# Altium PCB Mikrolysreklamen17.PcbDoc (part 2 of 2)
Units mm, origin at the board's own origin, x right, y up, seen from the top; angles counter-clockwise.
Board outline 168.74 x 42.98 mm, 2 copper layers (Top Layer, Bottom Layer), stack 1.671 mm thick; 124 components, 180 nets, 652 pads, 157 vias.
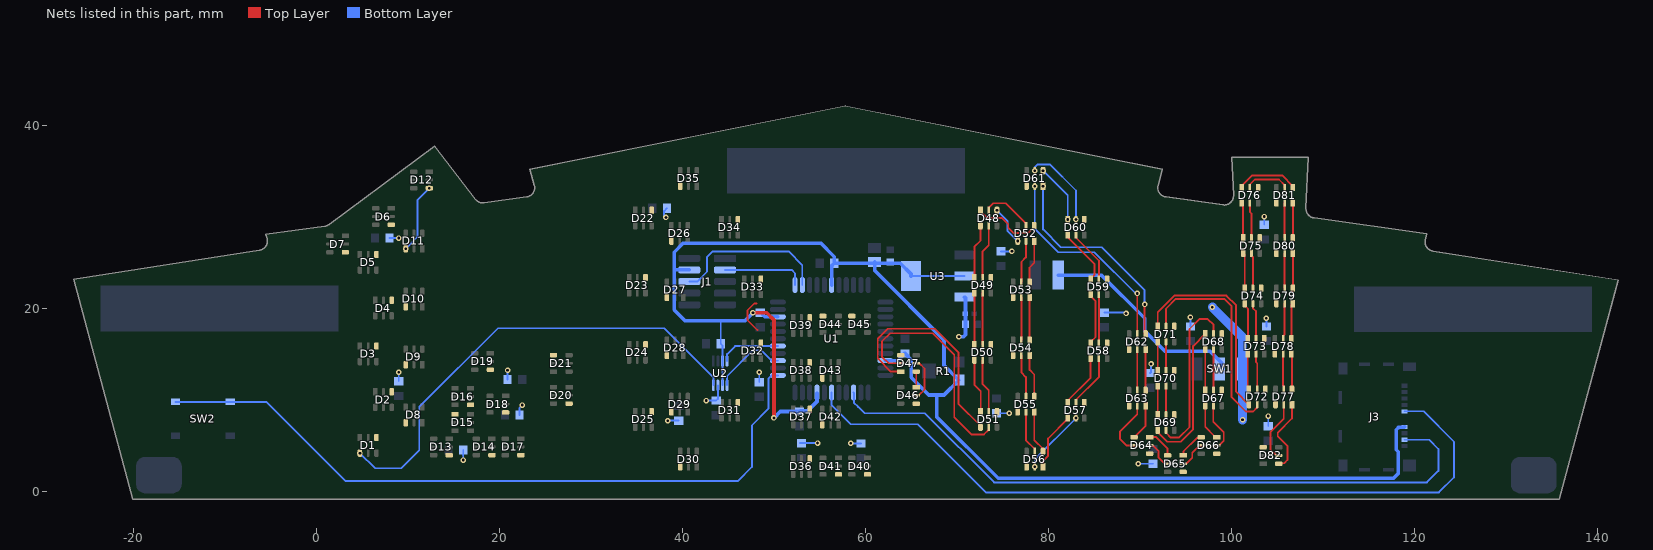
[diagram p2: the nets of this part, all layers, seen from the top]

## Via types
v1: diameter 0.6, hole 0.3, Top Layer to Bottom Layer, tented both sides, 157 vias

## Nets (pads, with @x,y where several pads share a name; then routed paths per layer and width w, separated by ;. In a path a pad name is that pad's centre, name@x,y a point inside that pad or via, vN(x,y) a via of type N, cw(c..) or ccw(c..) an arc to the next point about the centre after c; other vN are vias at no path point) (continued)
NetD46_2: D46.2 D47.5 | length 4.6
  Top Layer w0.2: D46.2@65.55,10.467 65.817,10.467 66.45,11.1 66.45,13.4 65.883,13.967 D47.5@65.55,13.967
NetD46_3: D46.3 D47.4 | length 1.7
  Top Layer w0.2: D46.3@65.55,11.4 D47.4@65.55,13.067
NetD47_2: D47.2 D51.5 | length 25.1
  Top Layer w0.2: D47.2@63.85,13.967 62.533,13.967 61.8,14.7 61.8,16.35 62.7,17.25 67.35,17.25 69.7,14.9 69.7,8.05 71.55,6.2 72.95,6.2 73.467,6.717 D51.5@73.467,6.983 D51.5@73.467,7
NetD47_3: D47.3 D51.4 | length 24.8
  Top Layer w0.2: D47.3@63.85,13.067 62.783,13.067 61.35,14.5 61.35,16.65 62.45,17.75 67.583,17.75 70.15,15.183 70.15,9.55 72.567,7.133 D51.4@72.567,6.983
NetD48_2: D48.2 D52.5 | length 5.7
  Top Layer w0.2: D48.2@73.467,30.683 73.467,30.967 73.95,31.45 75.35,31.45 77.533,29.267 D52.5@77.533,29.017
NetD48_3: D48.3 D52.4 | length 7.6
  Top Layer w0.2: D48.3@72.567,30.683 72.567,30.583 73.3,29.85 74.9,29.85 75.6,29.15 75.6,28.8 76.2,28.2 77.75,28.2 78.433,28.883 D52.4@78.433,29.017
NetD48_4: D48.4 D49.3 | length 5.9
  Top Layer w0.2: D49.3@71.9,23.35 71.9,26.7 72.567,27.367 D48.4@72.567,28.983
NetD48_5: D48.5 D49.2 | length 5.9
  Top Layer w0.2: D49.2@72.8,23.35 72.8,26.2 73.467,26.867 D48.5@73.467,28.983 D48.5@73.467,29
NetD49_4: D49.4 D50.3 | length 5.6
  Top Layer w0.2: D50.3@71.9,16 D50.3@71.9,16.017 D49.4@71.9,21.65
NetD49_5: D49.5 D50.2 | length 5.6
  Top Layer w0.2: D50.2@72.8,16.017 D49.5@72.8,21.65
NetD50_4: D50.4 D51.3 | length 6
  Top Layer w0.2: D50.4@71.9,14.317 71.9,11.633 72.6,10.933 D51.3@72.6,8.65
NetD50_5: D50.5 D51.2 | length 5.9
  Top Layer w0.2: D50.5@72.8,14.3 72.8,11.7 73.467,11.033 D51.2@73.467,8.683
NetD52_2: D52.2 D53.5 | length 4.7
  Top Layer w0.2: D53.5@77.033,22.85 77.033,25.033 77.533,25.533 D52.2@77.533,27.317
NetD52_3: D52.3 D53.4 | length 4.7
  Top Layer w0.2: D53.4@77.933,22.85 77.933,24.433 78.433,24.933 D52.3@78.433,27.317
NetD53_2: D53.2 D54.5 | length 4.6
  Top Layer w0.2: D54.5@77.033,16.517 D53.2@77.033,21.15
NetD53_3: D53.3 D54.4 | length 4.6
  Top Layer w0.2: D54.4@77.933,16.517 D53.3@77.933,21.15
NetD54_2: D54.2 D55.5 | length 4.7
  Top Layer w0.2: D54.2@77.033,14.817 77.033,12.967 77.533,12.467 D55.5@77.533,10.35
NetD54_3: D54.3 D55.4 | length 4.7
  Top Layer w0.2: D54.3@77.933,14.817 77.933,13.242 78.433,12.742 D55.4@78.433,10.35
NetD55_2: D55.2 D56.5 | length 4.7
  Top Layer w0.2: D55.2@77.533,8.65 77.533,5.567 78.5,4.6 D56.5@78.5,4.35
NetD55_3: D55.3 D56.4 | length 4.7
  Top Layer w0.2: D55.3@78.433,8.65 78.433,5.567 79.4,4.6 D56.4@79.4,4.35
NetD56_2: D56.2 D57.5 | length 7.2
  Bottom Layer w0.2: v1(78.5,2.65) 78.5,3.483 v1(83,7.983)
NetD56_3: D56.3 D57.4 | length 6.5
  Top Layer w0.2: D56.3@79.4,2.65 79.4,3.3 79.95,3.85 79.95,5.75 82.1,7.9 D57.4@82.1,7.983
NetD57_2: D57.2 D58.5 | length 5.8
  Top Layer w0.2: D57.2@83,9.683 83,9.967 85.5,12.467 D58.5@85.5,14.483
NetD57_3: D57.3 D58.4 | length 5.8
  Top Layer w0.2: D57.3@82.1,9.683 82.1,9.9 84.6,12.4 D58.4@84.6,14.483
NetD58_2: D58.2 D59.5 | length 5.3
  Top Layer w0.2: D58.2@85.5,16.183 D59.5@85.5,21.483
NetD58_3: D58.3 D59.4 | length 5.7
  Top Layer w0.2: D58.3@84.6,16.183 84.6,16.3 85.14,16.84 85.14,20.76 84.6,21.3 D59.4@84.6,21.483
NetD59_2: D59.2 D60.5 | length 5.8
  Top Layer w0.2: D60.5@83,27.983 83,27.7 85.5,25.2 D59.2@85.5,23.183
NetD59_3: D59.3 D60.4 | length 6.3
  Top Layer w0.2: D60.4@82.1,27.983 82.1,27.75 85.01,24.84 85.01,23.6 84.893,23.483 84.75,23.483 84.6,23.333 D59.3@84.6,23.183
NetD60_2: D60.2 D61.5 | length 9.4
  Bottom Layer w0.2: v1(78.5,35.017) 78.533,35.049 78.533,35.433 78.8,35.7 80.15,35.7 83,32.85 v1(83,29.683)
NetD60_3: D60.3 D61.4 | length 6.5
  Bottom Layer w0.2: v1(79.4,35.017) 82.1,32.317 v1(82.1,29.683)
NetD61_2: D61.2 D62.5 | length 23.5
  Top Layer w0.2: v1(78.5,33.317) D61.2@78.5,33.6 ; D62.5@89.7,17.183 v1(89.7,21.6)
  Bottom Layer w0.2: v1(78.5,33.317) 78.5,28.65 81.05,26.1 85,26.1 89.5,21.6 v1(89.7,21.6)
NetD61_3: D61.3 D62.4 | length 23.4
  Top Layer w0.2: v1(90.5,20.4) 90.477,20.377 90.477,17.307 D62.4@90.6,17.183
  Bottom Layer w0.2: v1(79.4,33.317) 79.4,28.6 81.35,26.65 85.8,26.65 90.5,21.95 v1(90.5,20.4)
NetD62_2: D62.2 D63.5 | length 4.5
  Top Layer w0.2: D63.5@89.7,11.017 D62.2@89.7,15.483
NetD62_3: D62.3 D63.4 | length 4.5
  Top Layer w0.2: D63.4@90.6,11.017 D62.3@90.6,15.483
NetD63_2: D63.2 D64.5 | length 6.2
  Top Layer w0.2: D64.5@89.35,5 88.5,5 87.8,5.7 87.8,6.5 89.7,8.4 D63.2@89.7,9.317
NetD63_3: D63.3 D64.4 | length 3.9
  Top Layer w0.2: D64.4@89.35,5.9 90.6,7.15 D63.3@90.6,9.317
NetD64_2: D64.2 D65.5 | length 3.2
  Top Layer w0.2: D64.2@91.05,5 91.4,5 92,4.4 92,3.7 92.7,3 D65.5@93.017,3
NetD64_3: D64.3 D65.4 | length 3.2
  Top Layer w0.2: D64.3@91.05,5.9 91.75,5.9 93.017,4.633 D65.4@93.017,3.9
NetD65_2: D65.2 D66.5 | length 3.1
  Top Layer w0.2: D65.2@94.717,3 95.05,3 95.7,3.65 95.7,4.2 96.5,5 D66.5@96.683,5
NetD65_3: D65.3 D66.4 | length 3
  Top Layer w0.2: D65.3@94.717,3.9 94.733,3.916 94.733,4.333 96.191,5.791 96.574,5.791 D66.4@96.683,5.9
NetD66_2: D66.2 D67.5 | length 5.3
  Top Layer w0.2: D67.5@98.033,9.317 98,9.283 98,7.6 99.15,6.45 99.15,5.5 98.65,5 D66.2@98.383,5
NetD66_3: D66.3 D67.4 | length 3.8
  Top Layer w0.2: D67.4@97.133,9.317 97.133,7.017 D66.3@98.183,5.967
NetD67_2: D67.2 D68.5 | length 4.5
  Top Layer w0.2: D67.2@98.033,11.017 D68.5@98.033,15.483 D68.5@98.033,15.517
NetD67_3: D67.3 D68.4 | length 4.5
  Top Layer w0.2: D67.3@97.133,11.017 D68.4@97.133,15.483
NetD68_2: D68.2 D69.5 | length 18.6
  Top Layer w0.2: D69.5@92.833,6.65 92.833,6.367 93.35,5.85 94.25,5.85 95.4,7 95.4,17.717 96.483,18.8 97.4,18.8 98.033,18.167 D68.2@98.033,17.183
NetD68_3: D68.3 D69.4 | length 16.1
  Top Layer w0.2: D69.4@91.933,6.65 91.933,6.417 92.95,5.4 94.433,5.4 95.8,6.767 95.8,15.85 D68.3@97.133,17.183
NetD69_2: D69.2 D70.5 | length 3.1
  Top Layer w0.2: D69.2@92.833,8.35 D70.5@92.833,11.483
NetD69_3: D69.3 D70.4 | length 3.1
  Top Layer w0.2: D69.3@91.933,8.35 D70.4@91.933,11.483
NetD70_2: D70.2 D71.5 | length 3.1
  Top Layer w0.2: D70.2@92.833,13.183 D71.5@92.833,16.317
NetD70_3: D70.3 D71.4 | length 3.1
  Top Layer w0.2: D70.3@91.933,13.183 D71.4@91.933,16.317
NetD71_2: D71.2 D72.5 | length 23.7
  Top Layer w0.2: D71.2@92.833,18.017 92.833,19.933 93.9,21 99.2,21 100,20.2 100,10.25 101.55,8.7 102.35,8.7 102.8,9.15 D72.5@102.8,9.45
NetD71_3: D71.3 D72.4 | length 22.7
  Top Layer w0.2: D71.3@91.933,18.017 91.933,19.542 93.751,21.36 99.44,21.36 100.5,20.3 100.5,10.85 D72.4@101.9,9.45
NetD72_2: D72.2 D73.5 | length 3.9
  Top Layer w0.2: D73.5@102.667,14.983 102.667,14.083 102.8,13.95 D72.2@102.8,11.15
NetD72_3: D72.3 D73.4 | length 3.7
  Top Layer w0.2: D73.4@101.767,14.983 101.767,11.333 D72.3@101.8,11.3
NetD73_2: D73.2 D74.5 | length 3.9
  Top Layer w0.2: D74.5@102.333,20.483 102.333,20 102.667,19.667 D73.2@102.667,16.683
NetD73_3: D73.3 D74.4 | length 3.9
  Top Layer w0.2: D74.4@101.433,20.483 101.433,20.267 101.8,19.9 D73.3@101.8,16.7
NetD74_2: D74.2 D75.5 | length 3.9
  Top Layer w0.2: D75.5@102.167,25.983 102.167,25.733 102.333,25.567 D74.2@102.333,22.183
NetD74_3: D74.3 D75.4 | length 3.9
  Top Layer w0.2: D75.4@101.267,25.983 101.433,25.817 D74.3@101.433,22.183
NetD75_2: D75.2 D76.5 | length 3.9
  Top Layer w0.2: D76.5@102,31.5 D76.5@102,31.483 102,30.5 102.167,30.333 D75.2@102.167,27.683
NetD75_3: D75.3 D76.4 | length 3.9
  Top Layer w0.2: D76.4@101.1,31.483 101.267,31.317 D75.3@101.267,27.683
NetD76_2: D76.2 D81.5 | length 4.8
  Top Layer w0.2: D76.2@102,33.183 102,33.5 102.55,34.05 105.183,34.05 105.8,33.433 D81.5@105.8,33.183
NetD76_3: D76.3 D81.4 | length 6.9
  Top Layer w0.2: D76.3@101.1,33.183 101.1,33.35 102.25,34.5 105.533,34.5 106.7,33.333 D81.4@106.7,33.183
NetD77_2: D77.2 D82.5 | length 6.7
  Top Layer w0.2: D82.5@105.15,3.9 104.9,3.9 104.25,4.55 104.25,6.45 105.7,7.9 D77.2@105.7,9.45
NetD77_3: D77.3 D82.4 | length 8.4
  Top Layer w0.2: D82.4@105.3,3 D82.4@105.15,3 105.2,3.05 105.75,3.05 106.1,3.4 106.1,4.95 105.05,6 105.05,6.4 106.6,7.95 D77.3@106.6,9.45
NetD77_4: D77.4 D78.3 | length 3.9
  Top Layer w0.2: D78.3@106.533,14.983 106.6,14.917 D77.4@106.6,11.15
NetD77_5: D77.5 D78.2 | length 3.9
  Top Layer w0.2: D78.2@105.633,14.983 105.633,11.55 105.7,11.483 D77.5@105.7,11.15
NetD78_4: D78.4 D79.3 | length 3.9
  Top Layer w0.2: D78.4@106.533,16.683 106.533,20.317 D79.3@106.7,20.483
NetD78_5: D78.5 D79.2 | length 3.9
  Top Layer w0.2: D78.5@105.633,16.683 105.633,16.983 105.8,17.15 D79.2@105.8,20.483
NetD79_4: D79.4 D80.3 | length 3.8
  Top Layer w0.2: D79.4@106.7,22.183 D80.3@106.7,25.983
NetD79_5: D79.5 D80.2 | length 3.8
  Top Layer w0.2: D79.5@105.8,22.183 D80.2@105.8,25.983
NetD80_4: D80.4 D81.3 | length 3.8
  Top Layer w0.2: D80.4@106.7,27.683 D81.3@106.7,31.483
NetD80_5: D80.5 D81.2 | length 3.8
  Top Layer w0.2: D80.5@105.8,27.683 D81.2@105.8,31.483
NetP1_1: P1.1 SW1.2 | length 23.3
  Bottom Layer w0.4: P1.1@81.07,23.6 85.8,23.6 90.5,18.9 90.5,17.5 92.7,15.3 97.617,15.3 98.9,14.017 SW1.2@98.9,13.35
NetU1_25: U1.25 U2.5 | length 8.2
  Bottom Layer w0.2: U2.5@44.879,11.566 44.879,12.579 47.7,15.4 48.6,15.4 49.75,14.25 U1.25@50.425,14.25
NetU1_27: U1.27 U2.4 | length 6.7
  Bottom Layer w0.2: U2.4@44.879,14.216 44.879,14.979 45.75,15.85 U1.27@50.425,15.85
PDI_CLOCK: J1.6 U1.35 | length 17.5
  Bottom Layer w0.2: J1.6@40.75,22.9 41.6,22.9 42.7,24 42.7,25.608 43.292,26.2 51.6,26.2 53.1,24.7 U1.35@53.1,22.525
PDI_DATA: J1.3 U1.34 | length 9.1
  Bottom Layer w0.2: J1.3@44.65,24.17 51.93,24.17 52.3,23.8 U1.34@52.3,22.525
SCK: J3.P5 U1.17 | length 84.7
  Bottom Layer w0.2: U1.17@56.3,10.775 56.3,9.4 58.4,7.3 65.7,7.3 73.14,-0.14 122.66,-0.14 124.3,1.5 124.3,5.4 120.98,8.72 J3.P5@118.89,8.72
SDI: D1.4 U2.8 | length 51.5
  Bottom Layer w0.2: v1(4.767,4.15) 6.417,2.5 9.3,2.5 11.25,4.45 11.25,9.2 19.85,17.8 38,17.8 43.379,12.421 U2.8@43.379,11.566
SS: J3.P2 U1.14 | length 75.6
  Bottom Layer w0.2: U1.14@58.7,10.775 58.729,10.746 58.729,9.671 59.2,9.2 59.9,8.5 66.5,8.5 74.05,0.95 121.345,0.95 122.6,2.205 122.6,4.6 121.58,5.62 J3.P2@118.89,5.62
"USER BUTTON": SW2.1 SW2.2 U1.23 | length 78.8
  Bottom Layer w0.2: SW2.2@-15.4,9.75 SW2.1@-9.4,9.75 -5.45,9.75 3.2,1.1 46.05,1.1 47.6,2.65 47.6,7.2 49.4,9 49.4,12.3 49.75,12.65 U1.23@50.425,12.65
VCC_P3V3: C1.2 C2.2 C3.2 C4.2 C5.2 C9.2 C10.2 J1.4 J3.P4 R1.3 U1.9 U1.19 U1.31 U1.39 U2.3 U2.6 U3.2 U3.4 | length 174.3
  Top Layer w0.4: v1(47.71,19.5) 49.2,19.5 50,18.7 v1(50,8)
  Bottom Layer w0.2: 44.179,18.6 C5.2@44.179,16.1 44.379,15.9 U2.3@44.379,14.216 U2.6@44.379,11.566 ; U3.4@64.975,23.5 U3.2@70.825,23.5
  Bottom Layer w0.4: J1.4@40.75,24.17 39.13,24.17 39.1,24.2 ; v1(47.71,19.5) v1@47.7,19.5 ; v1(50,8) 50.7,8.7 C3.2@52.8,8.7 52.866,8.766 53.666,8.766 54.7,9.8 U1.19@54.7,10.675 ; U1.31@50.425,19.05 49,19.05 48.55,19.5 v1@47.7,19.5 ; U1.39@56.3,22.525 56.3,24.6 C1.2@56.6,24.9 ; C10.2@61,25.05 C10.2@61,24.9 ; U1.9@62.175,14.25 63.5,14.25 64,14.75 64,14.8 64.25,15.05 64.35,15.05 64.6,14.8 64.6,14.75 65,14.35 65,12.425 66.925,10.5 67.8,10.5 ; U3.4@64.975,23.5 64.975,23.725 63.8,24.9 C10.2@61,24.9 ; J3.P4@118.89,7.02 118.865,6.995 118.295,6.995 118,6.7 118,4.51 118.22,4.29 118.22,1.92 117.7,1.4 74.5,1.4 67.8,8.1 67.8,10.5 ; 39.1,24.2 39.1,26.1 40.1,27.1 55.1,27.1 56.6,25.6 C1.2@56.6,24.9 ; 39.1,24.2 39.1,19.8 40.3,18.6 44.179,18.6 46.8,18.6 v1@47.7,19.5 ; C1.2@56.6,24.9 C10.2@61,24.9 ; C10.2@61,24.9 61,24.1 68.575,16.525 68.575,13.75 R1.3@70.2,12.125 68.575,10.5 67.8,10.5
VDD: C6.2 C7.2 C8.2 C11.2 C12.2 C13.2 C14.2 C15.2 C16.2 C17.2 C18.2 C19.2 C20.2 C21.2 C22.2 C23.2 C24.2 C25.2 C26.2 C27.2 C28.2 C29.2 D1.1 D2.1 D3.1 D4.1 D5.1 D6.1 D7.1 D8.1 D9.1 D10.1 D11.1 D12.1 D13.1 D14.1 D15.1 D16.1 D17.1 D18.1 D19.1 D20.1 D21.1 D22.1 D23.1 D24.1 D25.1 D26.1 D27.1 D28.1 D29.1 D30.1 D31.1 D32.1 D33.1 D34.1 D35.1 D36.1 D37.1 D38.1 D39.1 D40.1 D41.1 D42.1 D43.1 D44.1 D45.1 D46.1 D47.1 D48.1 D49.1 D50.1 D51.1 D52.1 D53.1 D54.1 D55.1 D56.1 D57.1 D58.1 D59.1 D60.1 D61.1 D62.1 D63.1 D64.1 D65.1 D66.1 D67.1 D68.1 D69.1 D70.1 D71.1 D72.1 D73.1 D74.1 D75.1 D76.1 D77.1 D78.1 D79.1 D80.1 D81.1 D82.1 SW1.1 U2.7 U3.3 | length 60.6
  Top Layer w0.2: 48.1,20.5 47.862,20.5 47.11,19.749 47.11,18.69 48.2,17.6
  Bottom Layer w0.2: C11.2@8,27.65 v1(9,27.65) ; C12.2@9,12 v1(9,13) ; v1(9.767,26.483) 11.05,27.767 11.05,31.8 v1(12.35,33.1) ; 16,3.933 C13.2@16,4 ; v1(16.05,3.4) C13.2@16.05,4.5 ; C15.2@20.9,12.2 v1(20.9,13.2) ; C14.2@22.2,8.3 22.2,9.1 v1(22.5,9.4) ; v1@38,29.9 38,30.6 C17.2@38.3,30.9 ; v1(38.4,7.7) C16.2@39.6,7.7 ; v1(42.6,9.9) C6.2@43.7,9.9 43.879,10.079 U2.7@43.879,11.566 ; C18.2@48.4,11.9 v1(48.4,13) ; C19.2@52.817,5.25 v1(54.76,5.25) ; v1@58.2,5.233 58.233,5.2 C20.2@59.5,5.2 ; C21.2@74.3,8.517 v1@75.483,8.517 ; v1(74.367,30.683) 75.5,29.55 75.5,28.45 v1(76.633,27.317) ; C22.2@74.8,26.2 v1@75.8,26.2 ; v1@75.683,8.517 v1(75.7,8.5) ; C23.2@86.1,19.5 88.282,19.5 88.362,19.42 v1(88.47,19.42) ; v1(89.8,3) C25.2@91.4,3 ; C24.2@91.1,12.9 91.2,13 v1(91.2,13.9) ; C26.2@95.5,18 v1(95.5,19) ; C29.2@103.567,29.1 v1(103.567,30) ; C28.2@103.8,18 v1(103.8,18.9) ; C27.2@104,7.1 v1(104,8.2)
  Bottom Layer w0.4: v1(70.217,16.871) 70.721,16.871 70.925,17.075 C8.2@70.925,18.25 70.925,21.1 U3.3@70.825,21.2
  Bottom Layer w1: v1(97.9,20.1) 101.2,16.8 SW1.1@101.2,13.35 v1(101.2,7.8)
  other v1: 58.4,5.233 76,26.2 38.2,29.9
pads on no net: D82.2 D82.3 J1.1 J1.5 J1.7 J1.8 J1.9 J3.P1 J3.P8 M1.0 M2.0 M3.0 U1.2 U1.3 U1.4 U1.5 U1.6 U1.7 U1.11 U1.12 U1.13 U1.20 U1.21 U1.22 U1.24 U1.26 U1.28 U1.29 U1.32 U1.33 U1.36 U1.37 U1.40 U1.41 U1.42 U1.43 U1.44

## Polygon pours and split planes (outlines as drawn)
GND on Bottom Layer "GND_L02_P006" (solid, remove dead copper, pour order 6): -26.27,-0.92 -26.27,42.05 142.09,42.05 142.09,-0.92
DUMMY_NET on Bottom Layer "Top Layer-gnd" (solid, pour order 2): 97,15.033 96.683,15.35 93.65,15.35 93.65,9.9 95,8.55 96.95,8.55 97,8.6
no net on Top Solder (solid): -19.579,-0.34 -25.732,22.58 -4.368,25.916 -4.818,27.592 3.197,28.721 0.397,26.646 -2.709,26.21 3.946,1.337 33.054,1.337 32.38,3.843 23.284,3.843 22.999,4.69 32.155,4.69 26.209,26.901 11.574,24.834 11.574,25.685 25.984,27.713 25.327,30.15 11.577,28.218 11.579,29.901 24.895,31.776 24.1,34.714 57.892,41.472 91.684,34.714 90.889,31.776 100.943,30.36 101.019,28.667 90.457,30.15 89.8,27.713 101.132,26.118 101.171,25.264 89.592,26.901 86.815,16.555 ccw(c64.494,18.872) 86.654,22.411 89.61,33.435 57.892,39.778 26.192,33.435 34.782,1.337 81.002,1.337 82.055,5.265 82.519,5.824 83.069,6.547 83.543,7.233 84.23,8.36 84.347,8.563 84.57,8.98 84.702,9.235 84.884,9.61 85.037,9.936 83.629,4.69 89.145,4.69 89.666,3.843 83.404,3.843 82.73,1.337 111.838,1.337 118.51,26.21 107.412,27.769 107.492,29.438 120.601,27.592 120.169,25.916 141.516,22.58 135.38,-0.34
no net on Top Solder (solid): 11.554,4.69 11.553,3.843 12.89,3.843 13.175,4.69
no net on Top Solder (solid): 15.157,4.69 16.953,4.69 17.236,3.843 14.874,3.843
no net on Top Solder (solid): 41.891,34.018 57.892,37.22 74.525,33.891 73.843,33.167 57.897,36.358 42.649,33.306
no net on Top Solder (solid): 98.605,4.69 102.159,4.69 ccw(c104.007,3.986) 102.034,3.843 98.086,3.843 ccw(c95.129,6.236)
no net on Top Solder (solid): 91.299,4.69 92.918,4.69 ccw(c94.301,7.474) 94.279,4.366 94.279,4.689 96.894,4.69 cw(c94.516,6.621) 95.807,3.843 92.411,3.843 cw(c93.689,6.677)
no net on Top Solder (solid): 57.123,4.69 73.398,4.69 74.154,3.843 57.123,3.843
no net on Top Solder (solid): 84.063,25.631 84.279,25.047 84.491,24.393 84.538,24.233 79.384,4.967 79.191,4.973 78.963,6.612
no net on Top Solder (solid): 43.545,4.69 51.55,4.69 51.55,3.843 42.698,3.843
no net on Top Solder (solid): 106.539,3.843 ccw(c104.568,3.991) 106.417,4.69 109.28,4.69 114.292,23.409 107.252,24.405 107.292,25.252 115.347,24.118 109.92,3.843
no net on Top Solder (solid): 81.424,32.511 86.481,31.499 85.279,27.005 85.11,27.36 84.81,27.95 84.726,28.101 85.461,30.842 82.377,31.459 82.167,31.701 81.867,32.037 81.647,32.274
no net on Top Solder (solid): 8.696,4.69 8.695,3.843 9.802,3.843 9.803,4.69
no net on Top Solder (solid): 79.19,32.716 79.909,31.953 79.096,32.117
no net on Top Solder (solid): 76.042,33.588 77.54,33.288 77.402,32.455 75.922,32.751
no net on Top Solder (solid): 75.826,4.69 77.492,4.69 77.624,3.843 75.965,3.843
no net on Top Solder (solid): 37.837,4.69 39.504,4.69 39.635,3.843 37.977,3.843
no net on Top Solder (solid): 37.877,32.351 38.002,33.24 39.596,33.559 39.445,32.665
no net on Top Solder (solid): 54.637,4.59 55.571,4.59 55.572,3.743 54.637,3.743
no net on Top Solder (solid): 8.705,24.428 8.705,25.282 9.803,25.436 9.803,24.584
no net on Top Solder (solid): 29.303,31.499 35.464,32.732 34.615,31.698 30.34,30.842 33.083,20.593 33.083,17.366
no net on Top Solder (solid): 4.112,10.391 0.437,24.118 4.106,24.634 4.106,23.779 1.492,23.409 4.11,13.629
no net on Top Solder (solid): 103.147,30.05 104.076,29.919 104.12,28.231 103.19,28.362
no net on Top Solder (solid): 9.803,29.651 8.707,29.496 8.706,27.814 9.803,27.968
no net on Top Solder (solid): 103.256,25.82 104.185,25.689 104.207,24.835 103.277,24.967
no net on Top Overlay (solid): 9.797,1.779 9.798,33.535 13.19,36.05 13.221,36.072 14.282,34.695 11.576,32.69 11.546,1.796
no net on Top Overlay (solid): 12.184,1.78 16.07,13.305 19.914,1.781 18.07,1.78 17.011,4.956 15.093,4.972 14.024,1.78
no net on Top Overlay (solid): 4.11,1.78 4.1,27.156 1.022,24.88 -0.002,26.279 8.703,32.728 8.689,1.796
no net on Top Overlay (solid): 20.896,1.78 16.55,14.678 18.082,19.307 23.977,1.78
no net on Top Overlay (solid): 24.72,8.831 24.736,12.22 28.96,12.22 28.96,8.846
no net on Top Overlay (solid): 33.078,7.9 33.078,29.5 cw(c55.25,15.852) 38.381,35.684 37.833,32.083 37.539,29.66 37.3,27.24 37.072,24.11 36.916,20.245 36.959,15.334 37.132,11.322 37.368,8.351 37.656,5.9 37.836,4.68 37.99,3.75 38.382,1.699 cw(c55.308,21.544)
no net on Top Overlay (solid): 39.977,1.744 39.326,5.858 38.892,9.2 38.507,13.39 38.338,17.299 38.367,20.97 38.551,24.792 38.741,27.133 39.02,29.724 39.399,32.423 39.699,34.181 39.988,35.651 41.814,34.1 43.416,32.545 44.736,31.055 45.81,29.618 46.736,28.113 47.119,27.374 47.54,26.44 47.99,25.23 48.368,23.9 48.634,22.593 48.776,21.582 48.897,20.102 48.93,18.825 48.87,17.12 48.74,15.86 48.414,14.02 48.196,13.165 47.97,12.38 47.626,11.371 47.26,10.45 46.836,9.5 46.307,8.498 45.72,7.509 45.27,6.84 44.67,6.03 43.759,4.942 43.54,4.7 42.692,3.856 42.16,3.37 41.55,2.87 40.7,2.225
no net on Top Overlay (solid): 51.648,1.78 51.647,12.326 49.972,12.33 49.979,14.091 51.647,14.089 51.651,19.104 54.445,19.104 54.443,19.031 54.443,14.089 55.355,14.089 55.353,19.102 60.894,19.104 60.884,17.339 57.117,17.341 57.117,14.089 58.788,14.085 58.784,12.329 57.117,12.326 57.117,3.513 60.871,3.498 60.871,1.796 55.37,1.796 55.355,12.326 54.443,12.326 54.428,1.796
no net on Top Overlay (solid): 62.563,8.833 62.573,12.22 66.797,12.22 66.797,8.846
no net on Top Overlay (solid): 62.561,13.176 66.797,13.192 66.797,14.894 62.573,14.894
no net on Top Overlay (solid): 71.067,7.896 71.067,29.497 cw(c93.239,15.848) 76.37,35.68 75.822,32.08 75.528,29.656 75.289,27.236 75.061,24.106 74.905,20.241 74.949,15.33 75.121,11.318 75.357,8.347 75.645,5.896 75.825,4.676 75.979,3.746 76.371,1.695 cw(c93.297,21.541)
no net on Top Overlay (solid): 77.967,1.74 77.315,5.854 76.881,9.196 76.496,13.386 76.327,17.296 76.356,20.966 76.541,24.788 76.73,27.129 77.01,29.72 77.388,32.42 77.688,34.177 77.977,35.647 79.803,34.096 81.405,32.541 82.725,31.051 83.799,29.614 84.725,28.109 85.108,27.37 85.529,26.436 85.979,25.226 86.357,23.896 86.623,22.59 86.766,21.578 86.887,20.098 86.919,18.821 86.859,17.116 86.729,15.856 86.403,14.016 86.185,13.161 85.959,12.376 85.615,11.367 85.249,10.446 84.825,9.496 84.296,8.495 83.709,7.505 83.259,6.836 82.659,6.026 81.748,4.938 81.529,4.696 80.681,3.852 80.149,3.366 79.539,2.866 78.689,2.222
no net on Top Overlay (solid): 88.817,19.538 90.575,19.538 90.575,19.536 90.579,6.085 90.6,5.807 90.66,5.52 90.778,5.205 90.896,4.983 91.054,4.753 91.266,4.511 91.537,4.268 91.828,4.063 92.171,3.874 92.569,3.708 92.817,3.629 93.22,3.537 93.645,3.486 93.888,3.478 94.319,3.499 94.71,3.56 95.043,3.643 95.359,3.751 95.674,3.892 95.945,4.045 96.198,4.22 96.444,4.432 96.712,4.733 96.909,5.04 97.039,5.329 97.11,5.56 97.157,5.833 97.171,6.058 97.169,19.537 98.938,19.536 98.93,6.088 98.91,5.81 98.87,5.53 98.827,5.352 98.683,4.902 98.544,4.588 98.371,4.274 98.127,3.915 97.843,3.573 97.489,3.22 97.068,2.872 96.512,2.502 96,2.23 95.596,2.058 95.085,1.887 94.526,1.76 94.038,1.706 93.623,1.707 93.168,1.761 92.591,1.897 91.976,2.12 91.4,2.4 90.839,2.753 90.285,3.193 89.897,3.576 89.628,3.899 89.321,4.354 89.09,4.813 88.931,5.276 88.84,5.7 88.817,6.118
no net on Top Overlay (solid): 91.485,19.537 94.058,19.521 94.073,4.38 cw(c93.871,6.746) 91.505,6.544
no net on Top Overlay (solid): 101.985,6.924 100.692,35.887 102.993,35.871 103.735,6.923
no net on Top Overlay (solid): 104.663,6.922 103.918,35.886 107.793,35.882 106.411,6.924
no net on Top Overlay (solid): 24.723,13.178 24.736,14.894 28.96,14.894 28.96,13.192
no net on Top Overlay (solid): 102.235,3.045 ccw(c104.209,3.986) 102.341,2.849 ccw(c104.228,3.997) 102.465,2.667 ccw(c104.246,4.011) 102.631,2.471 ccw(c104.264,4.028) 102.992,2.165 ccw(c104.272,4.041) 103.81,1.817 ccw(c104.278,4.066) 104.024,1.783 ccw(c104.281,4.09) 104.167,1.771 ccw(c104.282,4.114) 104.282,1.768 ccw(c104.282,4.12) 104.338,1.769 ccw(c104.283,4.102) 104.464,1.775 ccw(c104.285,4.078) 104.634,1.795 ccw(c104.289,4.053) 104.969,1.872 ccw(c104.294,4.037) 105.819,2.359 ccw(c104.31,4.018) 106.032,2.581 ccw(c104.328,4.003) 106.172,2.768 ccw(c104.347,3.991) 106.285,2.956 ccw(c104.38,3.974) 106.52,3.682 ccw(c104.367,3.976) 106.537,3.857 ccw(c104.344,3.977) 106.54,3.977 ccw(c104.336,3.977) 106.54,4.021 ccw(c104.353,3.978) 106.533,4.155 ccw(c104.381,3.98) 106.457,4.572 ccw(c104.377,3.979) 106.33,4.909 ccw(c104.356,3.968) 106.224,5.106 ccw(c104.337,3.957) 106.1,5.287 ccw(c104.319,3.943) 105.934,5.483 ccw(c104.301,3.926) 105.573,5.789 ccw(c104.292,3.913) 104.755,6.137 ccw(c104.286,3.888) 104.541,6.172 ccw(c104.284,3.864) 104.398,6.183 ccw(c104.283,3.84) 104.282,6.186 ccw(c104.282,3.834) 104.227,6.185 ccw(c104.282,3.853) 104.101,6.179 ccw(c104.28,3.876) 103.931,6.159 ccw(c104.276,3.901) 103.596,6.082 ccw(c104.271,3.917) 102.746,5.595 ccw(c104.254,3.936) 102.533,5.373 ccw(c104.237,3.951) 102.393,5.187 ccw(c104.218,3.964) 102.28,4.998 ccw(c104.185,3.98) 102.045,4.272 ccw(c104.198,3.979) 102.028,4.097 ccw(c104.221,3.977) 102.025,3.977 ccw(c104.228,3.977) 102.025,3.933 ccw(c104.212,3.977) 102.032,3.8 ccw(c104.184,3.974) 102.108,3.382 ccw(c104.188,3.976)
VDD on Top Layer "VDD_L01_P004" (solid, remove dead copper, pour order 4): -26.27,-0.92 -26.27,42.05 142.09,42.05 142.09,-0.92

## Keep-outs
Keep-Out Layer:
  lines w0.2: -26.498,23.158 -20.039,-0.9 135.825,-0.9 142.242,23.068 120.898,26.404 121.34,28.119 108.086,29.985 108.394,36.497 100.022,36.503 100.268,31.103 91.681,32.312 92.449,35.15 57.8,42.08 23.335,35.187 24.113,32.313 17.736,31.426 12.906,37.694 1.183,28.99 -5.508,28.048 -5.093,26.501 -26.498,23.158

## Other copper
Top Layer:
  pour cut-out: 74.6,31.1 74.6,30.3 75,30.3 75,31.1

## Silkscreen, mask and mechanical layers (free items; w line width, h text height)
Top Overlay:
  drawing of 492 lines, arcs and shapes, not listed
Bottom Overlay:
  rectangle: 5.2,3.1 7.2,10
  rectangle: 36.5,2 38.5,22.9
  lines w0.254: 67,8 66.496,8.791 ; 67.3,9 66.496,8.791 ; 69.8,9 70.504,8.791 ; 70.3,8 70.504,8.791 ; 66.496,8.791 ccw(c68.5,13.1) 70.504,8.791
  text "5V" at 80.5,26.9 h1 r270
  text "GND" at 78,26.8 h1 r270
  text "Mikrolysreklamen" at 99.1,25.6 h1
  text "Rev 0.2" at 99.1,23.6 h1
  text "Ta-De-Du! / Lysreklamen 2017" at 38.4,23.2 h2
  text "Skala 1:60" at 99.13,21.68 h1
  text "micro-SD CARD" at 125.546,15.154 h1
  text "-" at 66.046,8.754 h1
  text "+" at 71.546,8.687 h1
  text "OFF" at 96.19,6.92 h1
  text "ON" at 103.09,6.92 h1
  text "Brightness" at 71.446,6.487 h1
  text "Refysjef: / Sofie Afseth / Nestleder: / Erik Andre Jakobsen" at 4.8,3 h1
  text "Snorre N. Vestli / Oystein Smith / Aasmund Eldhuset / Einar Uvslokk / Eirik Veloy Nadim / Eline Stenwig / Frode van der Meeren / Jens Abraham / Kristoffer Selbekk Hille / Knut Aldrin (kons.) / Morten Liland (konsulent)" at 36,2.2 h1
Top Solder:
  pour cut-out: 99.01,5.18 99.01,4.9 cw(c98.74,4.9) 98.74,4.63 98.16,4.63 cw(c98.16,4.9) 97.89,4.9 97.89,5.18 cw(c98.16,5.18) 98.16,5.45 98.74,5.45 cw(c98.74,5.18)
  pour cut-out: 97.13,5.14 97.13,4.86 cw(c96.86,4.86) 96.86,4.59 96.28,4.59 cw(c96.28,4.86) 96.01,4.86 96.01,5.14 cw(c96.28,5.14) 96.28,5.41 96.86,5.41 cw(c96.86,5.14)
  pour cut-out: 86.61,20.79 86.33,20.79 cw(c86.33,21.06) 86.06,21.06 86.06,21.64 cw(c86.33,21.64) 86.33,21.91 86.61,21.91 cw(c86.61,21.64) 86.88,21.64 86.88,21.06 cw(c86.61,21.06)
  pour cut-out: 88.73,4.91 88.73,5.19 cw(c89,5.19) 89,5.46 89.58,5.46 cw(c89.58,5.19) 89.85,5.19 89.85,4.91 cw(c89.58,4.91) 89.58,4.64 89,4.64 cw(c89,4.91)
  pour cut-out: 91.11,5.17 91.39,5.17 cw(c91.39,4.9) 91.66,4.9 91.66,4.32 cw(c91.39,4.32) 91.39,4.05 91.11,4.05 cw(c91.11,4.32) 90.84,4.32 90.84,4.9 cw(c91.11,4.9)
  pour cut-out: 8.8,29.24 8.8,28.96 cw(c8.53,28.96) 8.53,28.69 7.95,28.69 cw(c7.95,28.96) 7.68,28.96 7.68,29.24 cw(c7.95,29.24) 7.95,29.51 8.53,29.51 cw(c8.53,29.24)
  pour cut-out: 86.613,20.98 86.333,20.98 cw(c86.333,21.25) 86.063,21.25 86.063,21.83 cw(c86.333,21.83) 86.333,22.1 86.613,22.1 cw(c86.613,21.83) 86.883,21.83 86.883,21.25 cw(c86.613,21.25)
  pour cut-out: 86.62,22.57 86.34,22.57 cw(c86.34,22.84) 86.07,22.84 86.07,23.42 cw(c86.34,23.42) 86.34,23.69 86.62,23.69 cw(c86.62,23.42) 86.89,23.42 86.89,22.84 cw(c86.62,22.84)
  pour cut-out: 86.6,15.68 86.32,15.68 cw(c86.32,15.95) 86.05,15.95 86.05,16.53 cw(c86.32,16.53) 86.32,16.8 86.6,16.8 cw(c86.6,16.53) 86.87,16.53 86.87,15.95 cw(c86.6,15.95)
  pour cut-out: 54.04,1.23 53.76,1.23 cw(c53.76,1.5) 53.49,1.5 53.49,2.08 cw(c53.76,2.08) 53.76,2.35 54.04,2.35 cw(c54.04,2.08) 54.31,2.08 54.31,1.5 cw(c54.04,1.5)
  pour cut-out: 52.24,1.23 51.96,1.23 cw(c51.96,1.5) 51.69,1.5 51.69,2.08 cw(c51.96,2.08) 51.96,2.35 52.24,2.35 cw(c52.24,2.08) 52.51,2.08 52.51,1.5 cw(c52.24,1.5)
  pour cut-out: 53.08,1.23 ccw(c53.08,1.46) 53.31,1.46 53.31,2.12 ccw(c53.08,2.12) 53.08,2.35 52.92,2.35 ccw(c52.92,2.12) 52.69,2.12 52.69,1.46 ccw(c52.92,1.46) 52.92,1.23
  pour cut-out: 16.82,4.75 ccw(c17.05,4.75) 17.05,4.52 17.71,4.52 ccw(c17.71,4.75) 17.94,4.75 17.94,4.91 ccw(c17.71,4.91) 17.71,5.14 17.05,5.14 ccw(c17.05,4.91) 16.82,4.91
  pour cut-out: 2.57,28.4 2.57,28.16 2.87,28.16 2.87,28.4
  pour cut-out: 114.465,4.69 118.856,21.042 135.224,18.483 131.525,4.69
  pour cut-out: 113.566,1.337 114.241,3.843 132.165,3.843 136.279,19.175 119.081,21.854 119.72,24.291 139.425,21.214 134.083,1.337
  pour cut-out: 1.319,4.69 -15.741,4.69 -19.44,18.483 -3.072,21.042
  pour cut-out: -18.299,1.337 -23.624,21.214 -3.936,24.291 -3.279,21.854 -20.478,19.175 -16.381,3.843 1.543,3.843 2.217,1.337
Mechanical 1:
  lines w0.2: -6.22,26.324 ccw(c-6.347,27.315) -5.38,27.57 -5.508,28.048 0.92,28.953 ccw(c0.793,29.945) 1.422,29.168 12.906,37.694 17.39,31.875 ccw(c18.174,32.495) 18.339,31.509 22.98,32.155 ccw(c22.853,33.147) 23.82,33.402 ; -6.22,26.325 -26.498,23.158 -20.039,-0.9 135.825,-0.9 142.242,23.068 122.01,26.23 cw(c122.14,27.221) 121.166,27.448 121.34,28.119 109.024,29.853 ; 23.818,33.401 23.335,35.187 57.8,42.08 92.449,35.15 91.965,33.361 ccw(c92.941,33.144) 92.83,32.151 99.059,31.274 ccw(c99.214,32.262) 100.213,32.32 100.022,36.503 108.394,36.497 108.13,30.91 ccw(c109.128,30.849) 109.024,29.854